# Altium PCB nRF24LE1F16Q24.PcbDoc
Units mil, origin at the board's own origin, x right, y up, seen from the top; angles counter-clockwise.
Board outline 6000 x 4000 mil, 2 copper layers (Top Layer, Bottom Layer); 18 components, 13 nets, 61 pads, 31 vias.
Unrouted connection lines stored in the file: 1.
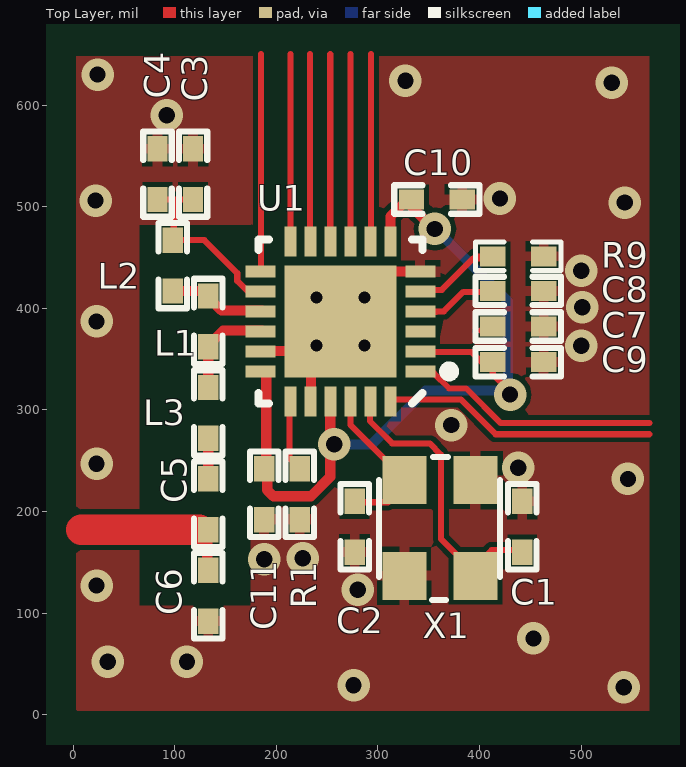
[diagram p0: Top Layer view]
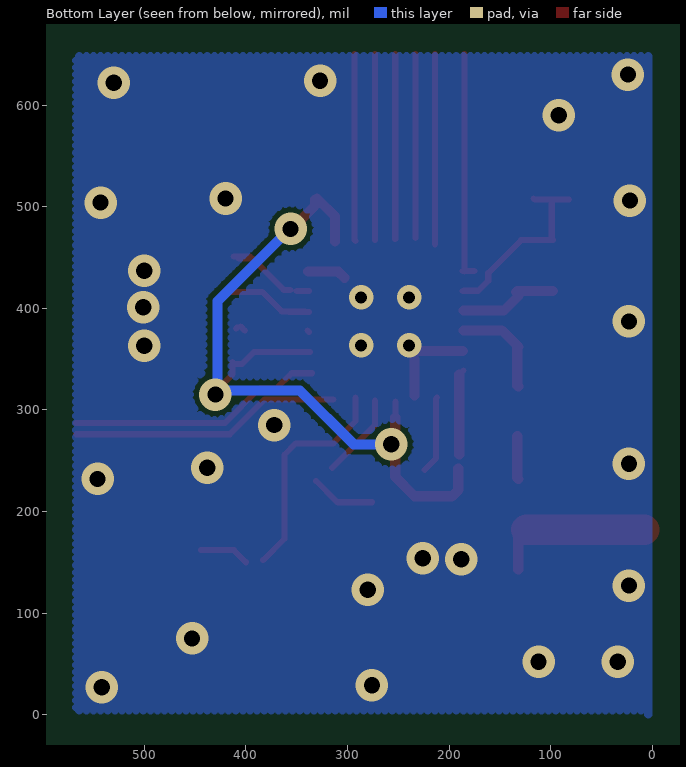
[diagram p1: Bottom Layer view, seen from below]

## Layer stack, top to bottom
Top Layer: signal copper 1.4
Dielectric: dielectric 12.6, FR-4, Dk 4.8
Bottom Layer: signal copper 1.4

## Board outline
-2384,-1625 3616,-1625 3616,2375 -2384,2375

## Design rules (kind name [scope] priority, off if disabled: settings)
Clearance [All] p1: gap=5
ComponentClearance [All] p1 off: gap=10 collisioncheckmode=3 verticalgap=10 showdistances=FALSE
FabricationTestPointUsage TestPointUsage [All] p1: valid=0 allowmultiple=FALSE
FabricationTestpoint Testpoint [All] p1: side=3 testpointundercomponent=TRUE minsize=40 maxsize=100 preferedsize=60 minholesize=0 maxholesize=40 preferedholesize=32 testpointgrid=1 allowsidetop=TRUE allowsidebottom=TRUE usegrid=TRUE gridtolerance=0.01
PolygonConnect PolygonConnect_1 [isvia and innet(GND)] p1: connectstyle=Direct reliefconductorwidth=10 reliefentries=4 polygonreliefangle="90 Angle"
PolygonConnect [All] p2: connectstyle=Relief reliefconductorwidth=10 reliefentries=4 polygonreliefangle="90 Angle"
RoomDefinition nRF24LE1F16Q24 [InComponentClass('nRF24LE1F16Q24')] p1 off: confinementstyle=ConfineIn formatcopy=TRUE lockcomponents=FALSE outline -3384,-2625 -1384,-2625 -1384,-1625 -3384,-1625
RoutingVias [All] p1: holewidth=28 width=50 viastyle="Through Hole" minholewidth=1 minwidth=1 maxholewidth=28 maxwidth=50
SilkscreenOverComponentPads [All] p1: minsilkscreentomaskgap=10
SolderMaskExpansion [All] p1: expansion=4
Width [All] p1: maxlimit=100 minlimit=1 preferedwidth=10 minimp=50.000000 maximp=50.000000 favimp=50.000000
24 further rules are at their usual default settings.

## Components (designator, comment, footprint, x,y, rotation, side; value= is the part's Value field where it differs from the comment)
C1 "NP0 50V" 0402s 442,185 r270 top
C2 "NP0 50V" 0402s 277,185 r90 top
C3 "X7R 16V" 0402s 118,532 r270 top
C4 "NP0 50V" 0402s 83,532 r270 top
C5 "NP0 +/-0.1pF, 50V" 0402s 133,207 r90 top
C6 "NP0 +/-0.1pF, 50V" 0402s 133,117 r270 top
C7 "X7R 16V" 0402s 438,382 r180 top
C8 "X7R 16V" 0402s 438,417 r180 top
C9 "X7R 16V" 0402s 438,347 r180 top
C10 "X7R 16V" 0402s 358,507 r180 top
C11 "X7R 16V" 0402s 188,217 r270 top
L1 "Murata LQP15MN6N8B02D" 0402s 133,387 r270 top
L2 "Murata LQP15MN6N8B02D" 0402s 98,442 r270 top
L3 "Murata LQP15MN5N6B02D" 0402s 133,297 r270 top
R1 "1%" 0402s 223,217 r270 top
R9 "" 0402s 438,451 r180 top
U1 "QFN24 4x4 package" NORDIC_QFN50P400X400X90-25N 263,387 r180 top
X1 "TSX-3225, 16MHz, Cl=9pF, +/-10ppm" "bt-xtal 3225" 381,136.67 r90 top

## Footprints (in the part's own frame and the unit in brackets; to place one, negate y for a bottom-side part, rotate by r counter-clockwise, add the part's x,y. Pads: shape width x height; smd on the part's side, far side on the other; paste and mask are expansions set on the pad)
0402s [mil]
  rect 25x20 smd: 1(-25,0) 2(25,0)
  silkscreen extent -42,-14 42,14
"bt-xtal 3225" [mm] "Mercury X32 series"
  rect 1.2x1.1 smd: 1(0,-0.381) 2(2.388,-0.381) 3(2.388,1.397) 4(0,1.4)
  silkscreen extent -0.61,-0.99 2.97,2.03
NORDIC_QFN50P400X400X90-25N [mm] "QFN24 4x4x0.85mm, 0.5mm pitch - Medium Density"
  rect 0.75x0.3 smd mask+0.076: 1(-2,1.25) 2(-2,0.75) 3(-2,0.25) 4(-2,-0.25) 5(-2,-0.75) 6(-2,-1.25) 13(2,-1.25) 14(2,-0.75) 15(2,-0.25) 16(2,0.25) 17(2,0.75) 18(2,1.25)
  rect 0.3x0.75 smd mask+0.076: 7(-1.25,-2) 8(-0.75,-2) 9(-0.25,-2) 10(0.25,-2) 11(0.75,-2) 12(1.25,-2) 19(1.25,2) 20(0.75,2) 21(0.25,2) 22(-0.25,2) 23(-0.75,2) 24(-1.25,2)
  rect 2.8x2.8 smd mask+0.076: 25(0,0)
  silkscreen extent -2.85,-2.05 2.05,2.05

## Part data
C1 C2 C3 C4 C5 C6 C7 C8 C9 C10 C11: library part Cap, "Capacitor"
L1 L2 L3: library part Inductor, "Inductor"
R1 R9: library part Res2, "Resistor"
U1: library part "nRF24LE1 - 4x4", "2.4GHz Tranceiver with embedded MCU and 10 bit ADC"
X1: library part BT-XTAL, "Crystal"

## Via types
v1: diameter 32, hole 16, Top Layer to Bottom Layer, tented both sides, 27 vias
v2: diameter 24, hole 12, Top Layer to Bottom Layer, tented both sides, 4 vias

## Nets (pads, with @x,y where several pads share a name; then routed paths per layer and width w, separated by ;. In a path a pad name is that pad's centre, name@x,y a point inside that pad or via, vN(x,y) a via of type N, cw(c..) or ccw(c..) an arc to the next point about the centre after c; other vN are vias at no path point)
GND: C1.1 C2.1 C3.1 C4.1 C6.2 C7.1 C8.1 C9.1 C10.1 C11.2 R1.2 R9.1 U1.6 U1.17 U1.20 U1.25 X1.2 X1.4 | length 124.7
  Top Layer w10: U1.17@186.54,357.79 234.21,357.79 U1.25@236,356 ; U1.20@234,314 U1.25@234,350 ; U1.25@303,430 309,436 U1.6@339,436
  other v1: 542,27 276,29 34,52 112,52 453,75 280,123 23,127 188,153 226,154 546,232 438,243 23,247 372,285 500,363 23,387 501,401 500,437 543,504 22,506 420,508 92,590 530,622 327,624 24,630
  other v2: 239.38,363.38 286.62,363.38 239.38,410.62 286.62,410.62
NetC1_2: C1.2 U1.23 X1.1 | length 268.3
  Top Layer w6: U1.23@292,312 292,289 314,267 351,267 362,256 362,173 X1.1@383,152 ; X1.1@400,150 412,162 C1.2@444,162
NetC2_2: C2.2 U1.22 X1.3 | length 147.1
  Top Layer w6: U1.22@273,309 273,285 X1.3@315,243 ; C2.2@276,209 310,209 X1.3@331,230
NetC3_2: C3.2 C4.2 L2.1 U1.14 | length 200.8
  Top Layer w6: C4.2@82,507 116,507 C3.2@117,508 ; L2.1 129,467 161.5,434.5 161.5,426.99 171.49,417 U1.14@187,417 ; L2.1@99,468 99,507 ; U1.14@173.53,417.47 U1.14@185.84,417.47
NetC5_1: C5.1 C6.1 | length 156.2
  Top Layer w10: C5.1@130,177 C5.1@133,180 ; C6.1@132,143 C5.1@132,179
  Top Layer w30: 8,182 C5.1@124,182
NetC5_2: C5.2 L3.2 | length 42.4
  Top Layer w10: C5.2@132,232 133,233 L3.2@133,274
NetC7_2: C7.2 U1.3 | length 9.3
  Top Layer w6: U1.3@338,376.79 U1.3@339.21,378 ; C7.2@401,378 C7.2@405.2,382.2 ; C7.2@408.47,381.2 C7.2@409.67,380
NetC8_2: C8.2 U1.4 | length 100.7
  Top Layer w6: U1.4@338,396.47 357.47,396.47 ; U1.4 364.84,396.84 384,416 C8.2@415,416
NetL1_1: L1.1 L2.2 U1.15 | length 96.5
  Top Layer w10: L2.2 133,417 L1.1@134,416 ; L1.1@131.67,412 145.88,397.79 U1.15@185.84,397.79
NetL1_2: L1.2 L3.1 U1.16 | length 100.3
  Top Layer w10: L1.2@131.67,362 147.77,378.1 U1.16@185.84,378.1 ; L3.1@132,323 133,324 L1.2
NetR1_1: R1.1 U1.19 | length 76
  Top Layer w6: U1.19@212,312 213,311 213,262 213,252 R1.1@224,241
PROG: R9.2 U1.5 | length 92.1
  Top Layer w6: U1.5@338,417 U1.5@350,417 ; U1.5@356,418 362.79,418 393.79,449 R9.2@407,449 ; 395.79,451 R9.2@412,451
VCC_NRF: C9.2 C10.2 C11.1 U1.2 U1.7 U1.18 U1.21 | length 842.9
  Top Layer w6: U1.18@185.84,338.73 U1.18@190,334.58 ; 252.77,292.77 U1.21@252.77,308.26 ; v1@253,270 v1(257,266) ; U1.2@337,357.1 380,357.1 ; 375,357 392,357 404,345 C9.2@409.67,345 ; C9.2 413,335 v1@428,320
  Top Layer w10: 190,256 U1.18@190,334.58 ; C11.1@191,242 191,221 197,215 234,215 253,234 253,292.55 ; U1.7 312.21,490.21 C10.2@330,508 ; C10.2@332,507 332,501 v1@355,478
  Bottom Layer w10: v1(257,266) 294,266 347,319 v1@430,319 ; v1@357,478 428,407 v1@428,321
  other v1: 430,315 356,478
pads on no net: U1.1 U1.8 U1.9 U1.10 U1.11 U1.12 U1.13 U1.24
copper on no net: | length 1662.1
  Top Layer w6: 175.26,436.53 186.54,436.53 ; 185,436 185,650 ; 214,463 214,650 ; 233,469 233,650 ; 253,468 253,650 ; 273,467 273,650 ; 292,466 293,467 293,650 ; 314,310 381.79,310 415.79,276 567,276 ; 335,336 355,336 370,321 386.79,321 420.79,287 567,287

## Polygon pours and split planes (outlines as drawn)
GND on Top Layer "Top Layer" (solid, remove dead copper, pour order 1000): 3,648 567,648 567,4 3.97,4 3,5
GND on Bottom Layer "Top Layer" (hatched 90Degree grid 7 track 8, remove dead copper, pour order 1001): 4,648 567,648 567,4 4.97,4 4,5

## Other copper
Top Layer:
  pour cut-out: 184.5,545.5 212,545.5 212,519 184.5,519
  pour cut-out: 228.5,288 239.5,288 239.5,284 228.5,284
  pour cut-out: 65,482 175,482 175,107 65,107